# Altium PCB SilentBotStep.PcbDoc
Units mm, origin at the board's own origin, x right, y up, seen from the top; angles counter-clockwise.
Board outline 15.24 x 20.32 mm, 4 copper layers (L1, L2, L3, L4), stack 1.57 mm thick; 17 components, 21 nets, 73 pads, 52 vias.
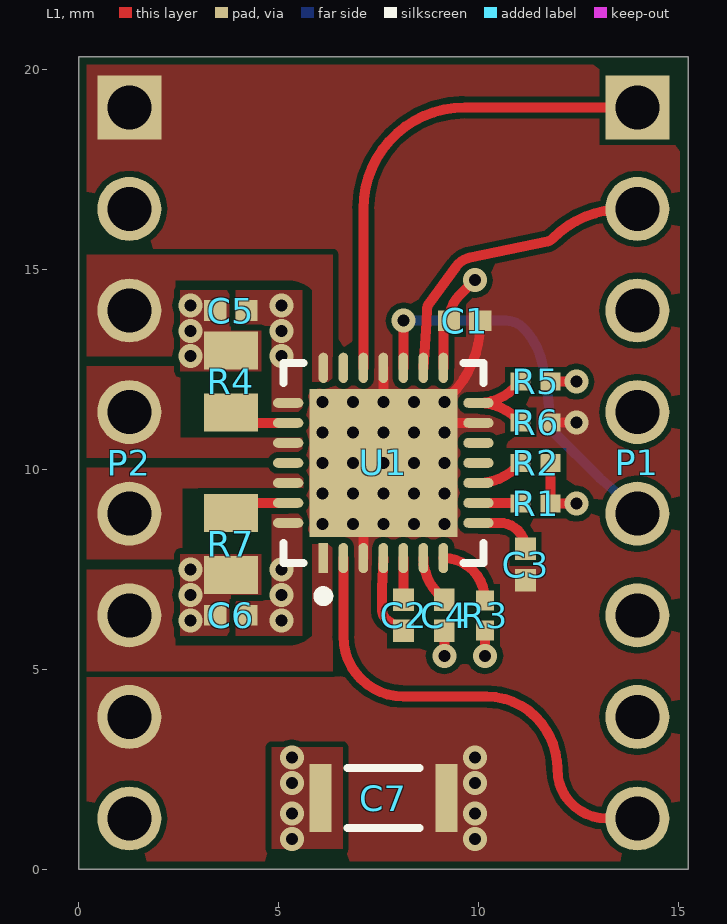
[diagram p0: L1 view]
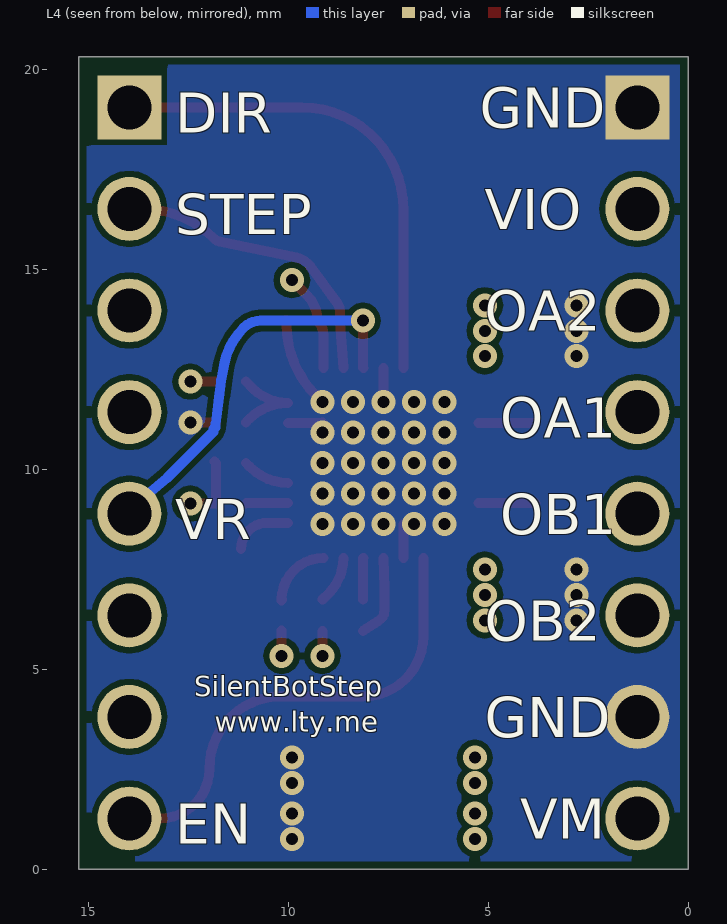
[diagram p1: L4 view, seen from below]
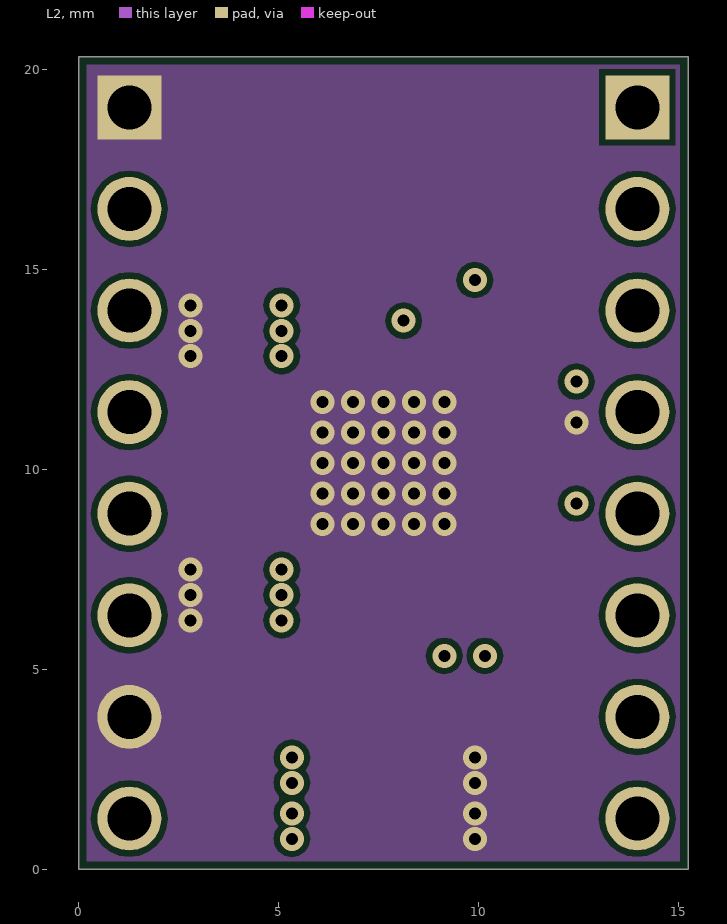
[diagram p2: L2]
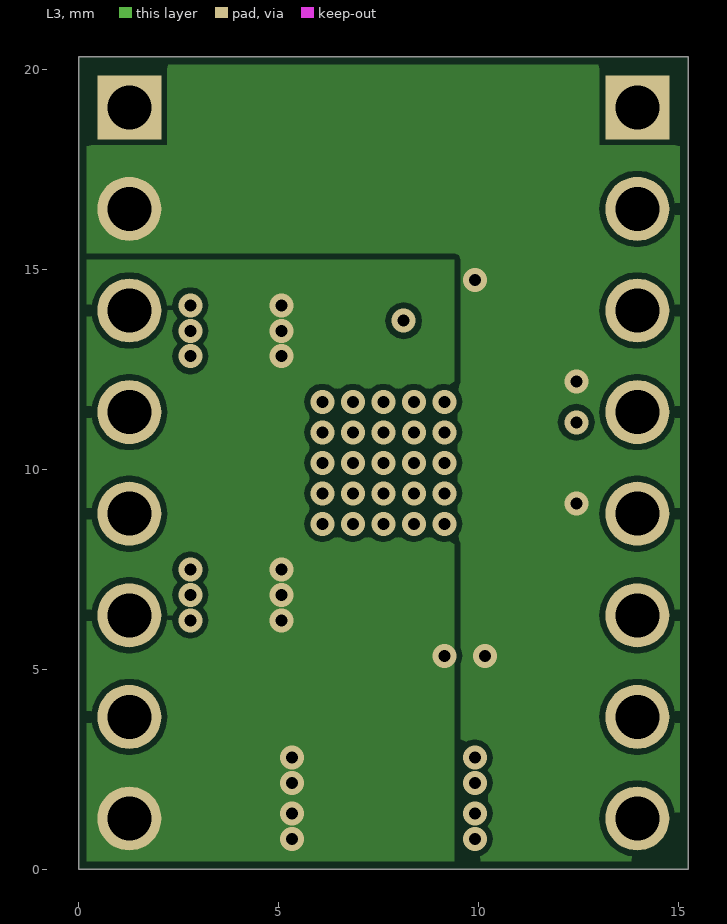
[diagram p3: L3]

## Layer stack, top to bottom
Top Solder: solder mask 0.02, SM-001, Dk 3.8
L1: signal copper 0.035
Dielectric 1: prepreg 0.1, PP-017, Dk 4.05
L2: signal copper 0.0175
Dielectric 3: core 1.265, Core-039, Dk 4.5
L3: signal copper 0.0175
Dielectric 5: prepreg 0.1, PP-017, Dk 4.05
L4: signal copper 0.035
Bottom Solder: solder mask 0.02, SM-001, Dk 3.8

## Board outline
0,0 0,20.32 15.24,20.32 15.24,0

## Design rules (kind name [scope] priority, off if disabled: settings)
BoardOutlineClearance [All] p1: gap=0.2 ignorepadtopadclearanceinfootprint=FALSE
Clearance [All] p1: gap=0.15 ignorepadtopadclearanceinfootprint=FALSE
ComponentClearance [All] p1: gap=0.25 collisioncheckmode=3 verticalgap=0.25 showdistances=FALSE
HoleSize [All] p1: absolutevalues=TRUE maxlimit=6.3 minlimit=0.3 maxpercent=80.000 minpercent=20.000
HoleToHoleClearance [All] p1: gap=0.2 allowstackedmicrovias=TRUE
MinimumSolderMaskSliver [All] p1 off: minsoldermaskwidth=0.2
PlaneClearance [All] p1: clearance=0.5
PlaneConnect [All] p1: planeconnectstyle=Direct reliefexpansion=0.508 reliefentries=4 reliefconductorwidth=0.254 reliefairgap=0.254
PolygonConnect [All] p1: connectstyle=Direct reliefconductorwidth=0.254 reliefentries=4 polygonreliefangle="90 Angle" airgapwidth=0.254
RoutingCorners [All] p1: cornerstyle=Round minsetback=2.5 maxsetback=2.5
RoutingVias [All] p1: holewidth=0.3 width=0.6 viastyle="Through Hole" minholewidth=0.3 minwidth=0.6 maxholewidth=6.3 maxwidth=10
SilkToSilkClearance [All] p1: silktosilkclearance=0.15
SilkToSolderMaskClearance [IsPad] p1: minsilkscreentomaskgap=0.15 clearancetoexposedcopper=TRUE
SolderMaskExpansion [All] p1: expansion=0.05 istentingtop=FALSE
UnRoutedNet [All] p1: checkbadconnections=TRUE
Width [All] p1: maxlimit=0.25 minlimit=0.15 preferedwidth=0.15
20 further rules are at their usual default settings.

## Components (designator, comment, footprint, x,y, rotation, side; value= is the part's Value field where it differs from the comment)
C1 "GRM155R71H104KE14D" CAPC1005X55X25LL05T10 9.652,13.716 r180 top
C2 "CC0402KRX7R9BB223" CAPC1005X55X25LL05T10 8.128,6.35 r270 top
C3 "GRM155R60J475ME47D" CAPC1005X55X25LL05T10 11.176,7.62 r90 top
C4 "GRM155R71H104KE14D" CAPC1005X55X25LL05T10 9.144,6.35 r270 top
C5 "GRM155R71H104KE14D" CAPC1005X55X25LL05T10 3.81,13.97 r180 top
C6 "GRM155R71H104KE14D" CAPC1005X55X25LL05T10 3.81,6.35 r180 top
C7 "C3216X7R1V106M160AC" CAPC3216X180X20LL20 7.62,1.778 r0 top
P1 "61300811121" 61300811121 13.97,10.16 r270 top
P2 "61300811121" 61300811121 1.27,10.16 r270 top
R1 "RC0402JR-070RL" RESC1005X40X25LL05T10 11.43,9.144 r180 top
R2 "RC0402JR-070RL" RESC1005X40X25LL05T10 11.43,10.16 r180 top
R3 "RC0402JR-070RL" RESC1005X40X25LL05T10 10.16,6.35 r90 top
R4 "RL1220S-R18-F" RESC2013X50X40LL20T20 3.81,12.192 r90 top
R5 "RC0402JR-070RL" RESC1005X40X25LL05T10 11.43,12.192 r180 top
R6 "RC0402JR-070RL" RESC1005X40X25LL05T10 11.43,11.176 r180 top
R7 "RL1220S-R18-F" RESC2013X50X40LL20T20 3.81,8.128 r270 top
U1 "TMC2209-LA-T" Trinamic_0_IPC_C 7.62,10.16 r90 top

## Footprints (in the part's own frame and the unit in brackets; to place one, negate y for a bottom-side part, rotate by r counter-clockwise, add the part's x,y. Pads: shape width x height; smd on the part's side, far side on the other; paste and mask are expansions set on the pad)
61300811121 [mm] "Pin Header, pitch 2.54 mm, THT, Vertical, single row, 8p"
  rect 1.6x1.6 hole 1.1: 1(-8.89,0)
  round 1.6 hole 1.1: 2(-6.35,0) 3(-3.81,0) 4(-1.27,0) 5(1.27,0) 6(3.81,0) 7(6.35,0) 8(8.89,0)
  body extent -10.16,-1.27 10.16,1.27, height 8.57
CAPC1005X55X25LL05T10 [mm] "Chip Capacitor, 2-Leads, Body 1.00x0.50mm, IPC High Density"
  rect 0.56x0.52 smd: 1(-0.39,0) 2(0.39,0)
  body extent -0.53,-0.28 0.53,0.28, height 0.55
CAPC3216X180X20LL20 [mm] "Chip Capacitor, 2-Leads, Body 3.40x1.80mm, IPC High Density"
  rect 0.55x1.7 smd: 1(-1.575,0) 2(1.575,0)
  silkscreen extent -0.9,-0.75 0.9,0.75, body extent -1.7,-0.9 1.7,0.9, height 1.8
RESC1005X40X25LL05T10 [mm] "Chip Resistor, 2-Leads, Body 1.00x0.50mm, IPC High Density"
  rect 0.5x0.45 smd: 1(-0.375,0) 2(0.375,0)
  body extent -0.53,-0.27 0.53,0.28, height 0.4
RESC2013X50X40LL20T20 [mm] "Chip Resistor, 2-Leads, Body 2.00x1.25mm, IPC High Density"
  rect 0.95x1.35 smd: 1(-0.775,0) 2(0.775,0)
  body extent -1.1,-0.72 1.1,0.72, height 0.5
Trinamic_0_IPC_C [mm]
  rect 0.756x0.242 smd paste+0 mask+0: 1(-2.378,1.5)
  rrect100% 0.756x0.242 smd paste+0 mask+0: 2(-2.378,1) 3(-2.378,0.5) 4(-2.378,0) 5(-2.378,-0.5) 6(-2.378,-1) 7(-2.378,-1.5) 15(2.378,-1.5) 16(2.378,-1) 17(2.378,-0.5) 18(2.378,0) 19(2.378,0.5) 20(2.378,1) 21(2.378,1.5)
  rrect100% 0.242x0.756 smd paste+0 mask+0: 8(-1.5,-2.378) 9(-1,-2.378) 10(-0.5,-2.378) 11(0,-2.378) 12(0.5,-2.378) 13(1,-2.378) 14(1.5,-2.378) 22(1.5,2.378) 23(1,2.378) 24(0.5,2.378) 25(0,2.378) 26(-0.5,2.378) 27(-1,2.378) 28(-1.5,2.378)
  rect 3.7x3.7 smd paste-1000 mask+0: 29(0,0)
  silkscreen extent -3.46,-2.5 2.5,2.5, body extent -2.86,-2.86 2.86,2.86, height 0.25

## Part data
C1 C4 C5 C6: library part CMP-001-00001-1, "MURATA - GRM155R71H104KE14D - CAP, MLCC, X7R, 0.1UF, 50V, 0402"
C2: library part CMP-001-00002-2, "Multilayer Ceramic Capacitors MLCC - SMD/SMT 22K pF 10% 50 Volts"
C3: library part CMP-001-00003-1, "CAP CER 4.7UF 6.3V X5R 0402"
C7: library part CMP-001-00000-1, "CERAMIC CAPACITOR, 10UF, 35V, X7R, 1206, FULL REEL; Product Range:C Series; Capacitance:10 F; Capacitance Tolerance: 20%; Dielectric Characteristic:X7R; Voltage Rating:35V; Ceramic Capacitor Case:1206 [3216 Metric]; MSL:- ;RoHS Compliant: Yes"
P1 P2: library part CMP-002-00000-1, "Board-To-Board Connector, Vertical, Wr-Phd Series, Through Hole, Header, 8, 2.54 Mm"
R1 R2 R3 R5 R6: library part CMP-009-00001-1, "YAGEO - RC0402JR-070RL. - RES, THICK FILM, 0R, 0.0625W, 0402"
R4 R7: library part CMP-009-00000-1, "RES SMD 180 MOHM 1% 1/3W 0805"
U1: library part CMP-012-0001-3, "Motor Driver, Stepper, QFN-28"

## Via types
v1: diameter 0.6, hole 0.3, L1 to L4, tented both sides, 27 vias
v2: diameter 0.6, hole 0.3, L1 to L4, 25 vias

## Nets (pads, with @x,y where several pads share a name; then routed paths per layer and width w, separated by ;. In a path a pad name is that pad's centre, name@x,y a point inside that pad or via, vN(x,y) a via of type N, cw(c..) or ccw(c..) an arc to the next point about the centre after c; other vN are vias at no path point)
DIR: P1.1 U1.19 | length 12.3
  L1 w0.25: U1.19 7.12,16.51 cw(c9.66,16.51) 9.66,19.05 P1.1
EN: P1.8 U1.2 | length 11.9
  L1 w0.25: U1.2 6.62,5.826 ccw(c8.128,5.826) 8.128,4.318 10.203,4.318 cw(c10.203,2.583) 11.43,3.81 cw(c10.129,2.509) 11.969,2.508 ccw(c13.208,2.509) 13.208,1.27 P1.8
GND: C1.1 C3.1 C5.2 C6.2 C7.2 P2.1 P2.7 R4.2 R6.1 R7.2 U1.3 U1.13 U1.18 U1.29 | length 5.5
  L1 w0.25: U1.29@7.112,8.636 7.12,8.628 U1.3 ; v2(7.62,11.684) U1.18 ; U1.29@9.144,11.176 9.16,11.16 U1.13 ; v2(9.144,11.684) 9.298,11.838 ccw(c7.502,13.634) 10.042,13.634 C1.1 C1.1@10.062,13.716 ; R6.1 v1(12.446,11.176)
  other v1: 9.906,0.762 9.906,1.397 9.906,2.159 9.906,2.794 2.794,6.223 2.794,6.858 2.794,7.493 2.794,12.827 2.794,13.462 2.794,14.097
  other v2: 6.096,8.636 6.858,8.636 7.62,8.636 8.382,8.636 9.144,8.636 6.096,9.398 6.858,9.398 7.62,9.398 8.382,9.398 9.144,9.398 6.096,10.16 6.858,10.16 7.62,10.16 8.382,10.16 9.144,10.16 6.096,10.922 6.858,10.922 7.62,10.922 8.382,10.922 9.144,10.922 6.096,11.684 6.858,11.684 8.382,11.684
NetC2_1: C2.1 U1.5 | length 1
  L1 w0.25: U1.5 8.124,7.778 8.124,6.744 C2.1
NetC2_2: C2.2 U1.4 | length 2.1
  L1 w0.25: U1.4 7.593,7.03 ccw(c7.868,7.02) 7.593,7.02 7.593,6.46 ccw(c7.868,6.46) 7.717,6.23 C2.2
NetC3_2: C3.2 U1.8 | length 1.5
  L1 w0.25: U1.8 10.526,8.66 cw(c10.526,8.01) C3.2
NetC4_1: C4.1 U1.6 | length 1.2
  L1 w0.25: U1.6 ccw(c9.87,7.782) 8.986,6.898 C4.1
NetR1_2: R1.2 U1.9 | length 1.1
  L1 w0.25: U1.9 11.016,9.16 cw(c11.016,9.105) R1.2
NetR2_2: R2.2 U1.10 | length 1.2
  L1 w0.25: U1.10 ccw(c9.998,11.005) 10.949,10.054 R2.2
NetR3_2: R3.2 U1.7 | length 1.7
  L1 w0.25: U1.7 cw(c9.12,6.742) 10.16,6.742 R3.2 ccw(c10.119,6.725) R3.2@10.148,6.754
NetR4_1: R4.1 U1.23 | length 1.4
  L1 w0.25: R4.1@3.81,11.163 3.813,11.16 U1.23
NetR5_2: R5.2 R6.2 U1.14 | length 2.4
  L1 w0.25: R6.2 10.976,11.255 ccw(c9.998,10.277) U1.14 ccw(c9.998,12.927) 10.894,12.031 R5.2
NetR7_1: R7.1 U1.27 | length 1.4
  L1 w0.25: R7.1@3.81,9.157 3.813,9.16 U1.27
OA1: P2.4 U1.24
OA2: P2.3 U1.21
OB1: P2.5 U1.26
OB2: P2.6 U1.1
STEP: P1.2 U1.16 | length 7.6
  L1 w0.25: U1.16 8.701,13.674 ccw(c8.128,13.716) 8.703,13.708 8.707,13.98 cw(c8.982,13.976) 8.76,14.138 9.442,15.071 cw(c9.906,14.732) 9.789,15.295 11.722,15.699 ccw(c11.672,15.943) 11.848,15.766 cw(c13.644,13.97) 13.644,16.51 P1.2
Vio: C1.2 P2.2 R1.1 R2.1 R3.1 R5.1 U1.15 | length 5.4
  L1 w0.25: U1.15 9.12,13.373 cw(c9.605,13.373) C1.2 cw(c10.16,13.716) 9.525,14.351 v1(9.906,14.732) ; v1(10.16,5.334) R3.1 ; R5.1 v1(12.446,12.192) ; R2.1@11.836,10.191 R2.1 R1.1 v1(12.446,9.144)
Vmo: C4.2 C5.1 C6.1 C7.1 P2.8 U1.22 U1.28 | length 0.6
  L1 w0.25: v1(9.144,5.334) C4.2
  other v1: 5.334,0.762 5.334,1.397 5.334,2.159 5.334,2.794 5.08,6.223 5.08,6.858 5.08,7.493 5.08,12.827 5.08,13.462 5.08,14.097
VREF: P1.5 U1.17 | length 10
  L1 w0.25: U1.17 8.124,12.542 8.124,12.799 8.128,12.803 v1(8.128,13.716)
  L4 w0.25: v1(8.128,13.716) 10.687,13.716 cw(c10.687,13.112) 11.112,13.541 11.114,13.539 cw(c9.867,12.292) 11.592,12.658 cw(c2.338,10.703) 11.733,11.798 11.81,11.141 11.821,11.046 11.871,11.005 11.871,10.938 13.022,9.787 13.03,9.779 13.96,9.003 13.969,8.9 P1.5
pads on no net: P1.3 P1.4 P1.6 P1.7 U1.11 U1.12 U1.20 U1.25

## Polygon pours and split planes (outlines as drawn)
GND on L2 "GND_L02_P000" (solid, remove dead copper, pour order 0): 0,0 15.24,0 15.24,20.32 0,20.32
GND on L4 "GND_L04_P001" (solid, pour order 1): 15.24,20.32 0,20.32 0,0 15.24,0
GND on L1 "GND_L01_P016" (solid, remove dead copper, pour order 16): 0,20.32 15.24,20.32 15.24,0 0,0
OB2 on L1 "OB2_L01_P015" (solid, remove dead copper, pour order 15): 0,4.953 0,7.493 2.413,7.493 2.413,5.588 5.229,5.588 ccw(c5.229,6.455) 5.842,5.842 5.842,8.128 6.35,8.128 6.35,4.953
OA2 on L1 "OA2_L01_P014" (solid, remove dead copper, pour order 14): 0,15.367 0,12.827 2.413,12.827 2.413,14.732 5.229,14.732 cw(c5.229,13.865) 5.842,14.478 5.842,12.192 6.35,12.192 6.35,15.367
Vmo on L1 "VMO_L01_P006" (solid, remove dead copper, pour order 6): 3.937,14.478 5.588,14.478 5.588,11.43 4.826,11.43 4.826,13.589 3.937,13.589
OB1 on L1 "OB1_L01_P013" (solid, remove dead copper, pour order 13): 0,10.033 5.638,10.033 5.638,9.525 2.59,9.525 2.59,7.747 0,7.747
OA1 on L1 "OA1_L01_P012" (solid, remove dead copper, pour order 12): 0,10.287 5.588,10.287 5.588,10.795 2.54,10.795 2.54,12.573 0,12.573
Vmo on L1 "VMO_L01_P007" (solid, remove dead copper, pour order 7): 3.937,5.842 5.588,5.842 5.588,8.89 4.826,8.89 4.826,6.731 3.937,6.731
GND on L1 "GND_L01_P004" (solid, pour order 4): 2.54,12.446 4.572,12.446 4.572,13.462 3.81,13.462 3.81,14.478 2.54,14.478
GND on L1 "GND_L01_P010" (solid, remove dead copper, pour order 10): 10.414,3.048 10.414,0.508 8.636,0.508 8.636,3.048
Vmo on L1 "VMO_L01_P009" (solid, remove dead copper, pour order 9): 4.826,3.048 6.604,3.048 6.604,0.508 4.826,0.508
GND on L1 "GND_L01_P002" (solid, pour order 2): 2.54,7.874 4.572,7.874 4.572,6.858 3.81,6.858 3.81,5.842 2.54,5.842
Vio on L3 "VIO_L03_P011" (solid, remove dead copper, pour order 11): 9.398,15.24 9.398,0 15.24,0 15.24,20.32 0,20.32 0,15.24
Vmo on L3 "VMO_L03_P008" (solid, remove dead copper, pour order 8): 0,0 9.398,0 9.398,15.24 0,15.24

## Silkscreen, mask and mechanical layers (free items; w line width, h text height)
Bottom Overlay:
  text "GND" at 5.207,18.542 h1
  text "DIR" at 12.827,18.415 h1
  text "VIO" at 5.08,16.002 h1
  text "STEP" at 12.827,15.875 h1
  text "OA2" at 5.08,13.462 h1
  text "OA1" at 4.699,10.795 h1
  text "OB1" at 4.699,8.382 h1
  text "VR" at 12.827,8.255 h1
  text "OB2" at 5.08,5.715 h1
  text "SilentBotStep" at 12.346,4.331 h0.5
  text "www.lty.me" at 11.838,3.442 h0.5
  text "GND" at 5.08,3.302 h1
  text "VM" at 4.191,0.762 h1
  text "EN" at 12.827,0.635 h1
Bottom Solder:
  rectangle: 5.334,7.874 9.906,12.446